# EAGLE board daughter-pots2 (EAGLE 6.6.0)

Size 100 x 80 mm. Coordinates in mm from the lower left corner, seen from the top.
Outline: 17.78,7.62 10.16,7.62 10.16,8.89
Outline: 17.78,7.62 25.4,7.62
Outline: 25.4,7.62 33.02,7.62
Outline: 33.02,7.62 38.1,7.62 38.1,8.89
Outline: 17.78,7.62 17.78,8.89
Outline: 25.4,7.62 25.4,8.89
Outline: 33.02,7.62 33.02,8.89
Outline: 22.86,2.54 15.24,2.54 15.24,3.81
Outline: 22.86,2.54 25.4,2.54
Outline: 25.4,2.54 33.02,2.54 33.02,3.81
Outline: 22.86,2.54 22.86,3.81
Outline: 25.4,2.54 25.4,3.81
Outline: 0,0 100,0 100,80 0,80 0,0
Outline: 4.45,10.79 4.45,4.45 10.79,4.45 10.79,10.79 4.45,10.79
Outline: 37.47,10.79 37.47,4.45 43.81,4.45 43.81,10.79 37.47,10.79
Copper layers (1*16): Top 0.035mm / dielectric 1.5mm / Bottom 0.035mm
Design rules "default": minimum track width 10mil, minimum drill 24mil, track to track 8mil, track to pad 8mil, pad to pad 8mil, via to via 8mil, smd to smd 8mil, copper to edge 40mil, drill to drill 8mil, minimum pad ring 10mil, minimum via ring 8mil, stop-mask expansion 4mil, vias tented up to drill 0mil, thermal gap 10mil

## Footprints (pad centres in the part's own frame; a part is rotated, then mirrored left to right if it is on the bottom)
SWPOT = drill 0.7 square: POT_A -2.54,0; POT_B 2.54,0; POT_W 0,0; SW_A -2.54,-5.08; SW_B 2.54,-5.08
1X04 = drill 1.016 long: 1 -3.81,0; 2 -1.27,0; 3 1.27,0; 4 3.81,0
DO35-3 = drill 0.9: A 3.81,0 | drill 0.9 square: C -3.81,0
TO92- = drill 0.7 octagon: 1 2.54,0; 2 0,0; 3 -2.54,0
R0207/3 = drill 0.7: 1 -3.81,0; 2 3.81,0
SPST = drill 0.7 square: 1 -1.27,0; 2 1.27,0

## Placement (x,y rotation side)
BACK  SWPOT  [SWPOT]  40.64,5.08 180 top
BUTTONS  [1X04]  5.71,-9.53 0 top  (outside the outline)
D1  1N4148-3  [DO35-3]  11.43,-30.48 0 top  (outside the outline)
D2  1N4148-3  [DO35-3]  5.08,-35.56 0 top  (outside the outline)
D3  1N4148-3  [DO35-3]  5.08,-40.01 0 top  (outside the outline)
D5  1N4148-3  [DO35-3]  5.08,-64.77 0 top  (outside the outline)
POTS  [1X04]  5.71,-3.81 0 top  (outside the outline)
Q1  2N3904  [TO92-]  3.81,-54.61 0 top  (outside the outline)
Q2  2N3904  [TO92-]  3.81,-25.4 0 top  (outside the outline)
R1  1K  [R0207/3]  16.51,-40.01 0 top  (outside the outline)
R2  300K  [R0207/3]  5.08,-44.45 0 top  (outside the outline)
R3  30k  [R0207/3]  15.24,-44.45 0 top  (outside the outline)
R4  30k  [R0207/3]  5.08,-48.9 0 top  (outside the outline)
R5  30k  [R0207/3]  15.24,-48.9 0 top  (outside the outline)
R6  1K  [R0207/3]  16.51,-69.22 0 top  (outside the outline)
R7  300K  [R0207/3]  5.08,-73.66 0 top  (outside the outline)
R9  30k  [R0207/3]  5.08,-78.11 0 top  (outside the outline)
SELECT  SWPOT  [SWPOT]  7.62,5.08 180 top
SW1  MOMENTARYSPST1  [SPST]  3.17,-14.61 0 top  (outside the outline)

## Library data of the parts
BACK SELECT = jaapie
BUTTONS POTS = pinhead
D1-D3 D5 = gm-diodes
Q1 Q2 = gm-trans
R1-R7 R9 = gm-resistors
SW1 = gm-switches

## Nets
B_BACK: BUTTONS.1 R3.1
B_SEL: BUTTONS.2 R4.1
B_SIDE: BUTTONS.3 R5.1
BPOT: BACK.POT_W POTS.2
GND: BACK.POT_A BACK.SW_B POTS.4 Q1.3 Q2.3 R2.1 R7.1 SELECT.POT_A SELECT.SW_B SW1.2
N$1: Q2.2 R1.2 R2.2
N$2: D1.C D2.C D3.C R1.1
N$3: Q1.2 R6.2 R7.2
N$4: D2.A R4.2
N$5: BACK.SW_A D1.A R3.2
N$6: Q1.1
N$7: D5.C
N$8: D3.A R5.2 SW1.1
N$9: D5.A R9.2
Q: BUTTONS.4 Q2.1
SPOT: POTS.3 SELECT.POT_W
VA: BACK.POT_B POTS.1 SELECT.POT_B

## Tracks (layer width: path | path; a pad name or v marks a point on that pad's centre or on a via)
B_BACK  (1 unrouted)
B_SEL  (1 unrouted)
B_SIDE  (1 unrouted)
BPOT  (1 unrouted)
GND  (9 unrouted)
N$1  (2 unrouted)
N$2  (3 unrouted)
N$3  (2 unrouted)
N$4  (1 unrouted)
N$5  (2 unrouted)
N$8  (2 unrouted)
N$9  (1 unrouted)
Q  (1 unrouted)
SPOT  (1 unrouted)
VA  (2 unrouted)